# Altium PCB HackatonCircuit.PcbDoc
Units mm, origin at the board's own origin, x right, y up, seen from the top; angles counter-clockwise.
Board outline 94.67 x 39.78 mm, 2 copper layers (Top Layer, Bottom Layer); 39 components, 27 nets, 167 pads, 19 vias.
Unrouted connection lines stored in the file: 1.
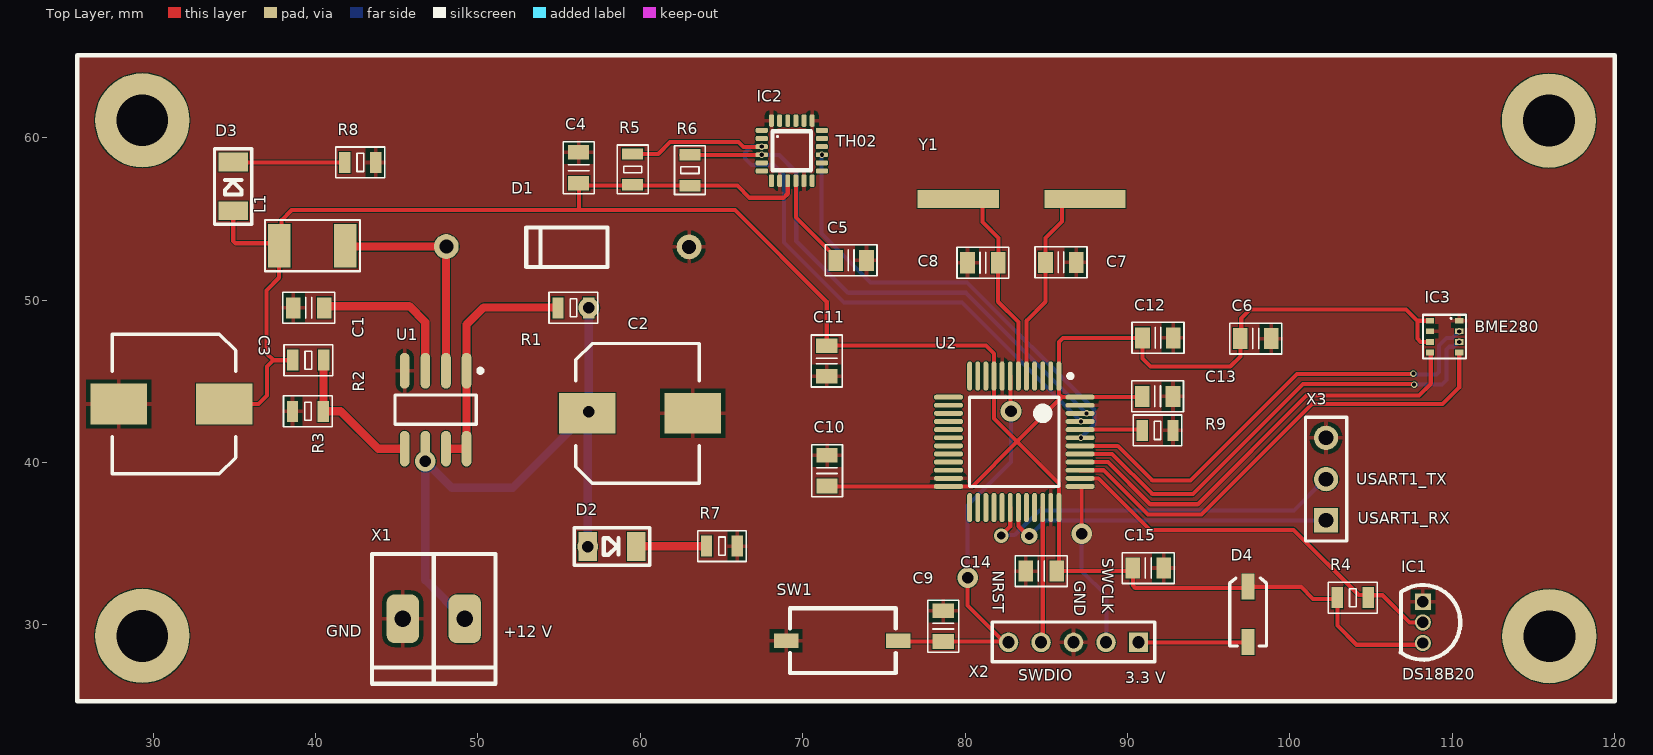
[diagram p0: Top Layer view]
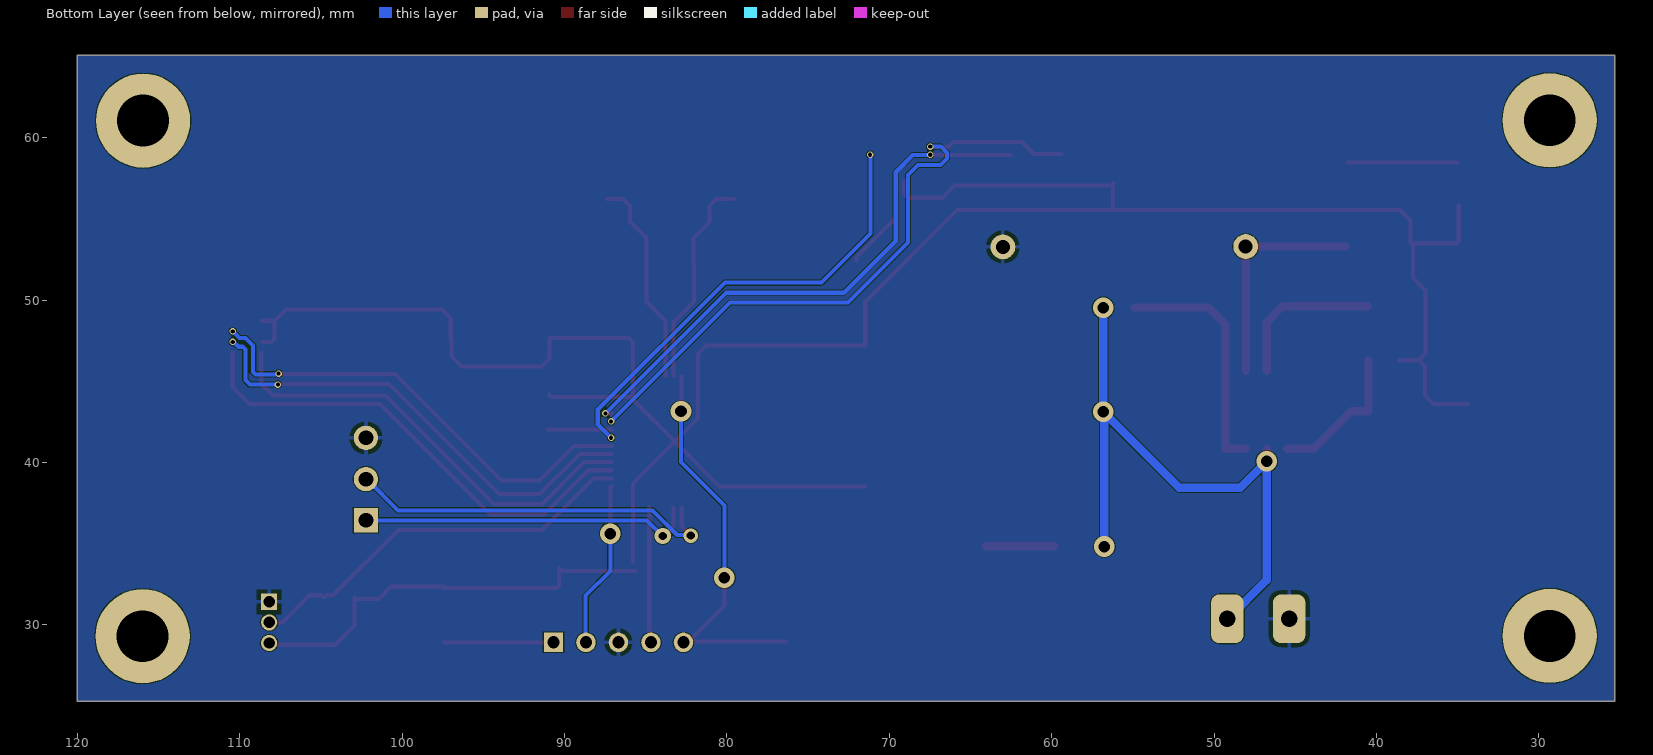
[diagram p1: Bottom Layer view, seen from below]

## Layer stack, top to bottom
Top Solder: solder mask 0.0102, Solder Resist, Dk 3.5
Top Layer: signal copper 0.0356
Dielectric 1: dielectric 0.32, FR-4, Dk 4.8
Bottom Layer: signal copper 0.0356
Bottom Solder: solder mask 0.0102, Solder Resist, Dk 3.5

## Board outline
25.325,25.3 25.325,65.075 120,65.075 120,25.3

## Design rules (kind name [scope] priority, off if disabled: settings)
Clearance [All] p1: gap=0.05 ignorepadtopadclearanceinfootprint=TRUE except(0: Arc-Hole Track-Hole SMDPad-Hole THPad-Hole Via-Hole Fill-Hole Poly-Hole Region-Hole Text-Hole)
PasteMaskExpansion [All] p1 off: expansion=0
PolygonConnect [All] p1: connectstyle=Relief reliefconductorwidth=0.254 reliefentries=4 polygonreliefangle="90 Angle" airgapwidth=0.254
RoutingVias [All] p1: holewidth=0.254 width=0.4 viastyle="Through Hole" minholewidth=0.254 minwidth=0.4 maxholewidth=0.711 maxwidth=1.27
SolderMaskExpansion [All] p1 off: expansion=0.102 istentingtop=FALSE
Width [All] p1: maxlimit=0.6 minlimit=0.254 preferedwidth=0.254 minimp=50.000000 maximp=50.000000 favimp=50.000000
29 further rules are at their usual default settings.

## Classes and differential pairs
component class Designator: C7 C8 C9 C10 C11 C12 C13 C14 C15 D4 R9 SW1 U2 X2 X3 Y1

## Components (designator, comment, footprint, x,y, rotation, side; value= is the part's Value field where it differs from the comment)
C1 "300 pF" C_0805 39.575,49.525 r0 top
C2 "47 uF" "Cap 0810 F" 56.725,43.025 r0 top
C3 "100 uF" "Cap 0810 F" 34.375,43.6 r180 top
C4 "0.1 uF" C_0805 56.2,58.15 r270 top
C5 "4.7 uF" C_0805 72.975,52.45 r180 top
C6 "0.1 uF" C_0805 97.896,47.631 r0 top
C7 "10 pF" C_0805 85.9,52.325 r180 top
C8 "10 pF" C_0805 81.096,52.302 r0 top
C9 "0.1 uF" C_0805 78.65,29.925 r270 top
C10 "4.7 uF" C_0805 71.5,39.5 r270 top
C11 "0.1 uF" C_0805 71.475,46.25 r90 top
C12 "0.1 uF" C_0805 91.875,47.675 r180 top
C13 "0.1 uF" C_0805 91.85,44.075 r180 top
C14 "0.1 uF" C_0805 84.688,33.312 r0 top
C15 "0.1 uF" C_0805 91.275,33.5 r180 top
D1 "1N5819" DO-41 63,53.275 r90 top
D2 "RED" LED_1206 58.25,34.825 r0 top
D3 "GREEN" LED_1206 34.925,57 r90 top
D4 "MBR0520L" SOD-123 97.425,30.65 r90 top
IC1 "DS18B20" DS18B20 108.189,28.882 r0 top
IC2 "TH-02" TH-02 67.475,60.45 r0 top
IC3 "BME280" BME280 110.425,48.725 r0 top
L1 "68 uH" L_1210 39.8,53.35 r180 top
R1 "0.43 Ohm" R_0805 55.875,49.525 r180 top
R2 "15 kOhm" R_0805 39.55,46.3 r0 top
R3 "9.1 kOhm" R_0805 39.525,43.15 r0 top
R4 "4.7 kOhm" R_0805 103.871,31.676 r0 top
R5 "10 kOhm" R_0805 59.525,58.05 r270 top
R6 "10 kOhm" R_0805 63.05,58 r270 top
R7 "600 Ohm" R_0805 65.025,34.85 r0 top
R8 "180 Ohm" R_0805 42.75,58.475 r180 top
R9 "10 kOhm" R_0805 91.85,41.975 r180 top
SW1 "KLS7-TS3611" KLS7-TS3611 72.475,29.025 r180 top
U1 "MC34063" SO-8 47.39,43.25 r270 top
U2 "STM32F103C8T6" LQFP48_N 83.025,41.275 r270 top
X1 "DG340R-3.81-02P" 340-021-12 47.275,30.375 r0 top
X2 "PLS2-5" PLS-5-2 90.675,28.925 r90 top
X3 "PLS-3" PLS-3-3D 102.225,36.435 r90 top
Y1 "HC-49SM" HC-49SM 79.575,56.225 r0 top

## Footprints (in the part's own frame and the unit in brackets; to place one, negate y for a bottom-side part, rotate by r counter-clockwise, add the part's x,y. Pads: shape width x height; smd on the part's side, far side on the other; paste and mask are expansions set on the pad)
340-021-12 [mm]
  rrect50% 2x3 hole 1: 1(1.905,0) 2(-1.905,0)
  silkscreen extent -3.81,-4 3.81,4, body extent -4,-3.75 3.81,3.75, height 8.5
BME280 [mm]
  rect 0.5x0.35 smd: 1(0,0) 2(0,-0.65) 3(0,-1.3) 4(0,-1.95) 5(-1.8,-1.95) 6(-1.8,-1.3) 7(-1.8,-0.65) 8(-1.8,0)
  silkscreen extent -2.22,-2.32 0.43,0.38, body extent -2.15,-2.22 0.35,0.28, height 1.02
C_0805 [mm] "Capacitor Pattern"
  rect 0.9x1.3 smd: 1(-0.95,0) 2(0.95,0)
  silkscreen extent -1.6,-0.95 1.6,0.95, body extent -1,-0.63 1,0.62, height 0.6
"Cap 0810 F" [mm] "Aluminum SMT 8.6x8.6x10mm cap"
  rect 3.5x2.5 smd: 1(6.5,0) 2(0,0)
  silkscreen extent -0.7,-4.3 6.9,4.3, body extent -1.65,-4.25 8.05,4.25, height 10.3
DO-41 [mil]
  round 60 hole 34.02: 1(0,0) 2(0.98,588.58)
  silkscreen extent -48,198 47,395, body extent -49,-17 49,605, height 99
DS18B20 [mm]
  rect 1x1 hole 0.7: 1(0,2.54)
  round 1 hole 0.7: 2(0,1.27) 3(0,0)
  silkscreen extent -1.38,-1.03 2.3,3.57, body extent -1.19,-1.02 2.37,3.56, height 6.18
HC-49SM [mm]
  rect 5x1.1 smd: 1(0,0) 2(7.8,0)
  body extent -2.03,-2.37 9.58,2.33, height 4.2
KLS7-TS3611 [mm]
  rect 1.5x0.9 smd mask+0: 1(-3.4,0) 2(3.5,0)
  silkscreen extent -3.25,-2 3.25,2, body extent -3.49,-1.8 3.49,1.7, height 5.24
L_1210 [mil] "Chip Inductor, 2-Leads, Body 3,1x2,5mm, IPC Medium Density"
  rect 55x105 smd: 1(-80,0) 2(80,0)
  silkscreen extent -115,-62 115,62, body extent -63,-50 63,48, height 99
LED_1206 [mm]
  rect 1.15x1.8 smd: 1(-1.5,0) 2(1.5,0)
  silkscreen extent -2.32,-1.15 2.33,1.15, body extent -1.6,-0.8 1.6,0.8, height 1.1
LQFP48_N [mm] "Thin QFP, 48-Leads, Body 7x7mm, Pitch 0.5mm, IPC Medium Density"
  oval 1.8x0.3 smd: 1(-4.05,2.75) 2(-4.05,2.25) 3(-4.05,1.75) 4(-4.05,1.25) 5(-4.05,0.75) 6(-4.05,0.25) 7(-4.05,-0.25) 8(-4.05,-0.75) 9(-4.05,-1.25) 10(-4.05,-1.75) 11(-4.05,-2.25) 12(-4.05,-2.75) 25(4.05,-2.75) 26(4.05,-2.25) 27(4.05,-1.75) 28(4.05,-1.25) 29(4.05,-0.75) 30(4.05,-0.25) 31(4.05,0.25) 32(4.05,0.75) 33(4.05,1.25) 34(4.05,1.75) 35(4.05,2.25) 36(4.05,2.75)
  oval 0.3x1.8 smd: 13(-2.75,-4.05) 14(-2.25,-4.05) 15(-1.75,-4.05) 16(-1.25,-4.05) 17(-0.75,-4.05) 18(-0.25,-4.05) 19(0.25,-4.05) 20(0.75,-4.05) 21(1.25,-4.05) 22(1.75,-4.05) 23(2.25,-4.05) 24(2.75,-4.05) 37(2.75,4.05) 38(2.25,4.05) 39(1.75,4.05) 40(1.25,4.05) 41(0.75,4.05) 42(0.25,4.05) 43(-0.25,4.05) 44(-0.75,4.05) 45(-1.25,4.05) 46(-1.75,4.05) 47(-2.25,4.05) 48(-2.75,4.05)
  silkscreen extent -4.17,-2.75 2.75,3.58, body extent -4.5,-4.5 4.5,4.5, height 1.5
PLS-3-3D [mm] "Connector; Header; 3 Position"
  rect 1.5x1.5 hole 0.9: 1(0,0)
  round 1.5 hole 0.9: 2(2.54,0) 3(5.08,0)
  silkscreen extent -1.27,-1.27 6.35,1.27, body extent -1.27,-1.27 6.35,1.27, height 8.44
PLS-5-2 [mm] "Connector; Header; 1x5 Position"
  rect 1.2x1.2 hole 0.75: 1(0,0)
  round 1.2 hole 0.75: 2(0,2) 3(0,4) 4(0,6) 5(0,8)
  silkscreen extent -1.2,-1 1.25,9, body extent -1.2,-1 1.2,9, height 5.5
R_0805 [mm] "Resistor Pattern"
  rect 0.7x1.3 smd: 1(-0.95,0) 2(0.95,0)
  silkscreen extent -1.5,-0.95 1.5,0.95, body extent -1,-0.6 1,0.6, height 0.5
SO-8 [mm] "SOIC, 8-Leads, Body 4.9x3.9mm, Pitch 1.27mm, IPC Medium Density"
  oval 2.2x0.6 smd: 1(-2.4,1.905) 2(-2.4,0.635) 3(-2.4,-0.635) 4(-2.4,-1.905) 5(2.4,-1.905) 6(2.4,-0.635) 7(2.4,0.635) 8(2.4,1.905)
  silkscreen extent -2.52,-2.5 0.9,2.88, body extent -3.17,-2.51 3.17,2.49, height 1.88
SOD-123 [mm] "SOD-123; 2 Leads; Body 2.7 x 1.6 mm, (LxW)"
  rect 1.6x0.8 smd: 1(-1.7,0) 2(1.7,0)
  silkscreen extent -1.95,-1.12 2.24,1.12, body extent -1.87,-0.86 1.98,0.84, height 1.43
TH-02 [mm]
  rrect50% 0.75x0.3 smd: 1(0,0) 2(0,-0.5) 3(0,-1) 4(0,-1.5) 5(0,-2) 6(0,-2.5) 13(3.7,-2.5) 14(3.7,-2) 15(3.7,-1.5) 16(3.7,-1) 17(3.7,-0.5) 18(3.7,0)
  rrect50% 0.3x0.75 smd: 7(0.6,-3.1) 8(1.1,-3.1) 9(1.6,-3.1) 10(2.1,-3.1) 11(2.6,-3.1) 12(3.1,-3.1) 19(3.1,0.6) 20(2.6,0.6) 21(2.1,0.6) 22(1.6,0.6) 23(1.1,0.6) 24(0.6,0.6)
  silkscreen extent 0.65,-2.45 3.02,-0.05, body extent -0.16,-3.26 3.86,0.76, height 0.9

## Part data
C1 C4 C5 C6 C7 C8 C9 C10 C11 C12 C13 C14 C15: library part C0805, "Capacitor"
C2 C3: library part CAP0810Alu, "Capacitor"
D2 D3: library part LED_SMT_1206, "Typical INFRARED GaAs LED"
D4: library part DZ_SOD123, "Surface Mount Zener Diode", ComponentLink1Description="Manufacturer Link", ComponentLink1URL=http://www.vishay.com/, DatasheetDocument="REV. L-2", LatestRevisionDate=17-Jul-2002, LatestRevisionNote="Re-released for DXP Platform.", PackageReference=SOD-123, Published=8-Jun-2000, Publisher="Altium Limited"
IC1: library part DS18B20+, "Programmable Resolution 1-Wire Digital Thermometer"
IC2: library part TH_02, "Temperature and humidity sensor"
L1: library part L1210, "Inductor", Part Number=NLCV32T-680K-EF
R1 R2 R3 R4 R5 R6 R7 R8 R9: library part R0805, "Resistor"
SW1: library part button
X1: "Connectors", Type=DG340R-3.81-02P
X2: "Header, 5-Pin", LatestRevisionDate=17-Jul-2002, LatestRevisionNote="Re-released for DXP Platform.", Publisher="Altium Limited"
X3: "Header, 3-Pin", LatestRevisionDate=17-Jul-2002, LatestRevisionNote="Re-released for DXP Platform.", Publisher="Altium Limited"
U2: ComponentLink1Description="Manufacturer URL", ComponentLink1URL=http://www.st.com/, ComponentLink2Description="STM32F103 Datasheet", ComponentLink2URL=http://www.st.com/internet/com/TECHNICAL_RESOURCES/TECHNICAL_LITERATURE/DATASHEET/CD00161566.pdf, ComponentLink3Description="STM32 Family Web Page", ComponentLink3URL=www.st.com/stm32, DatasheetVersion="rev13.0, Apr-2011", PackageDescription="48-Pin Low-Profile Quad Flat Pack, 7 x 7 mm Body, 0.5 mm Pitch (LQFP48)", PackageReference=LQFP48, PackageVersion="rev13, Apr-2011"

## Free pads (board coordinates)
  round 5.8 hole 3.2: 2(29.325,29.325) 2(29.325,61.075) 2(115.95,61.05) 2(115.975,29.3)

## Via types
v1: diameter 0.4, hole 0.254, Top Layer to Bottom Layer, 10 vias
v2: diameter 1.27, hole 0.711, Top Layer to Bottom Layer, 7 vias
v3: diameter 1, hole 0.5, Top Layer to Bottom Layer, 1 vias
v4: diameter 0.9, hole 0.508, Top Layer to Bottom Layer, 1 vias

## Nets (pads, with @x,y where several pads share a name; then routed paths per layer and width w, separated by ;. In a path a pad name is that pad's centre, name@x,y a point inside that pad or via, vN(x,y) a via of type N, cw(c..) or ccw(c..) an arc to the next point about the centre after c; other vN are vias at no path point)
"3.3 V": C3.2 C4.2 C6.1 C10.2 C11.2 C12.2 C13.2 C14.2 C15.2 D3.1 D4.2 IC1.3 IC2.9 IC3.6 IC3.8 L1.2 R2.1 R4.1 R5.2 R6.2 U2.1 U2.9 U2.24 U2.36 U2.48 | length 181.3
  Top Layer w0.254: C3.2 36.475,43.6 37,44.125 37,45.9 37.4,46.3 ; D3.1@34.925,55.815 D3.1 34.925,53.649 35.074,53.5 37.618,53.5 L1.2 ; 38.507,55.532 37.891,54.916 37.891,53.473 L1.2 ; 38.525,55.55 56.225,55.55 65.825,55.55 71.475,49.9 C11.2 81.275,47.2 81.775,46.7 U2.9 81.775,42.699 83.194,41.279 ; R2.1 37.4,46.3 ; C4.2 56.35,57.05 59.525,57.05 R6.2 65.975,57.05 66.725,56.3 68.825,56.3 69.075,56.55 IC2.9 ; 56.225,55.575 C4.2@56.225,57.05 ; C10.2@71.462,38.525 U2.24 80.44,38.525 83.194,41.279 ; C14.2 90.137,33.312 C15.2 90.325,32.424 90.474,32.275 D4.2@97.425,32.275 ; C14.2@85.775,33.9 U2.36 85.775,38.699 83.194,41.279 ; C13.2@90.95,44.175 90.8,44.025 U2.48 87.066,44.034 85.949,44.034 ; D4.2 100.675,32.35 101.425,31.6 102.845,31.6 R4.1 102.921,29.954 104.1,28.775 108.082,28.775 IC1.3 ; IC3.6 108.05,47.425 107.85,47.625 107.85,48.725 ; IC3.8 107.85,48.725 ; 37.4,46.3 36.975,46.725 36.975,50.6 37.75,51.375 37.75,53.332 L1.2 ; 83.194,41.279 85.949,44.034 ; 85.949,44.034 85.784,44.199 85.784,45.316 U2.1 85.775,47.425 86.025,47.675 C12.2 90.925,46.4 91.425,45.9 96.325,45.9 96.946,46.521 C6.1 97,47.685 97,48.875 97.55,49.425 107.15,49.425 107.85,48.725
GND: C1.1 C2.1 C3.1 C4.1 C5.1 C6.2 C7.1 C8.1 C9.1 C10.1 C11.1 C12.1 C13.1 C14.1 C15.1 D1.1 IC1.1 IC2.8 IC2.11 IC2.19 IC2.24 IC3.1 IC3.7 R3.1 R7.2 R8.1 R9.1 SW1.2 U1.4 U2.8 U2.23 U2.35 U2.47 X1.2 X2.3 X3.3
NetC1_2: C1.2 U1.3 | length 9.6
  Top Layer w0.254: U1.3@46.75,45.655 U1.3
  Top Layer w0.512: C1.2@40.525,49.625 45.775,49.625 46.75,48.65 U1.3@46.75,45.655
NetC2_2: C2.2 D2.1 R1.1 U1.6 X1.1 | length 38.8
  Top Layer w0.254: C2.2 v2(56.825,43.125)
  Top Layer w0.512: v2(46.755,40.074) U1.6
  Bottom Layer w0.512: X1.1@49.185,30.325 46.755,32.755 v2(46.755,40.074) 48.379,38.45 52.15,38.45 v2@56.725,43.025 ; v2(56.75,34.825) v2@56.75,43 ; v2(56.825,43.125) v2(56.825,49.525)
NetC5_2: C5.2 IC2.10 | length 5.9
  Top Layer w0.254: IC2.10 69.575,55.1 72.025,52.65 C5.2
NetC7_2: C7.2 U2.5 Y1.2 | length 13
  Top Layer w0.254: U2.5 83.775,48.725 84.95,49.9 C7.2 84.95,53.825 85.975,54.85 85.975,55.802 86.398,56.225 Y1.2
NetC8_2: C8.2 U2.6 Y1.1 | length 13.1
  Top Layer w0.254: Y1.1 80.652,56.225 81.075,55.802 81.075,54.8 82.046,53.829 C8.2 82.025,52.281 82.025,49.9 83.275,48.65 U2.6
NetD1_2: D1.2 L1.1 U1.2 | length 13.9
  Top Layer w0.254: L1.1 L1.1@41.882,53.3
  Top Layer w0.512: L1.1@41.882,53.3 D1.2 ; U1.2 D1.2@48.025,53.275
NetD2_2: D2.2 R7.1 | length 4.3
  Top Layer w0.512: D2.2@59.825,34.85 R7.1
NetD3_2: D3.2 R8.2 | length 6.8
  Top Layer w0.254: D3.2@35,58.475 R8.2@41.775,58.475
NetD4_1: D4.1 X2.1 | length 6.8
  Top Layer w0.254: X2.1 97.4,28.925 D4.1
NetIC1_2: IC1.2 R4.2 U2.38 | length 24.9
  Top Layer w0.254: U2.38 88.2,39.025 91.375,35.85 100.225,35.85 104.239,31.836 104.661,31.836 R4.2 104.97,31.825 105.7,31.825 107.373,30.152 IC1.2
NetIC2_3: IC2.3 R5.1 U2.45 | length 39.9
  Top Layer w0.254: R5.1@59.375,59 61.1,59 61.825,59.725 66.05,59.725 66.35,59.425 66.717,59.425 66.719,59.427 67.452,59.427 v1(67.475,59.45) ; U2.45 v1(87.125,42.525)
  Bottom Layer w0.254: v1(67.475,59.45) 66.825,59.45 66.45,59.075 66.45,58.725 66.85,58.325 68.225,58.325 68.85,57.7 68.85,53.55 72.55,49.85 79.8,49.85 v1(87.125,42.525)
NetIC2_4: IC2.4 R6.1 U2.46 | length 34.5
  Top Layer w0.254: R6.1@62.5,58.925 67.225,58.925 67.25,58.95 v1(67.475,58.95) ; U2.46 v1(87.475,43.025)
  Bottom Layer w0.254: v1(67.475,58.95) 67.5,58.925 68.55,58.925 69.6,57.875 69.6,53.65 72.8,50.45 80.05,50.45 v1(87.475,43.025)
NetIC2_15: IC2.15 U2.43 | length 28.3
  Top Layer w0.254: U2.43 v1(87.125,41.525)
  Bottom Layer w0.254: v1(71.175,58.95) 71.15,58.925 71.15,54.1 74.175,51.075 80.125,51.075 87.95,43.25 87.95,42.35 v1(87.125,41.525)
NetIC3_2: IC3.2 U2.42 | length 29
  Top Layer w0.254: U2.42 89.4,41.025 91.525,38.9 93.875,38.9 100.425,45.45 107.575,45.45 v1(107.6,45.475)
  Bottom Layer w0.254: v1(107.6,45.475) 107.628,45.447 107.731,45.447 107.753,45.425 109.026,45.425 109.175,45.574 109.175,47.2 109.636,47.661 110.011,47.661 v1(110.425,48.075)
NetIC3_3: IC3.3 U2.41 | length 29.4
  Top Layer w0.254: U2.41 89.05,40.525 91.525,38.05 94.025,38.05 100.8,44.825 107.625,44.825 v1(107.65,44.8)
  Bottom Layer w0.254: v1(107.65,44.8) 109.375,44.8 109.65,45.075 109.65,46.95 109.83,47.13 110.09,47.13 110.385,47.425 v1(110.425,47.425)
NetIC3_4: IC3.4 U2.39 | length 29.9
  Top Layer w0.254: U2.39 88.525,39.525 91.25,36.8 94.55,36.8 101.35,43.6 109.4,43.6 110.425,44.625 IC3.4
NetIC3_5: IC3.5 U2.40 | length 27.7
  Top Layer w0.254: U2.40 88.8,40.025 91.4,37.425 94.325,37.425 101.025,44.125 107.95,44.125 108.675,44.85 108.675,46.727 108.627,46.775 IC3.5
NetR1_2: R1.2 U1.1 U1.7 U1.8 | length 15
  Top Layer w0.254: R1.2@54.9,49.55 R1.2
  Top Layer w0.512: U1.7 U1.8 U1.1 49.295,48.495 50.35,49.55 R1.2@54.9,49.55
NetR2_2: R2.2 R3.2 U1.5 | length 8.9
  Top Layer w0.254: R3.2 R3.2@40.487,43.162 ; R2.2@40.487,46.287 R2.2
  Top Layer w0.512: R3.2@40.487,43.162 41.537,43.162 43.85,40.85 U1.5 ; R3.2@40.487,43.366 R2.2@40.487,46.287
NetR9_2: R9.2 U2.44 | length 4
  Top Layer w0.254: U2.44 R9.2@91.047,42.025
NRST: C9.2 SW1.1 U2.7 X2.5 | length 25
  Top Layer w0.254: SW1.1@76.35,28.975 82.27,28.975 82.369,29.074 82.419,29.074 82.27,29.074 80.15,31.194 v2(80.15,32.9) ; X2.5@82.419,28.925 X2.5 X2.5@82.526,29.074 ; U2.7 82.784,45.316 82.784,43.191 v2(82.825,43.15)
  Bottom Layer w0.254: v2(80.15,32.9) 80.15,37.35 82.825,40.025 v2(82.825,43.15)
SWCLK: U2.37 X2.2 | length 10.3
  Top Layer w0.254: U2.37 87.154,38.525 87.175,38.504 v2(87.175,35.623)
  Bottom Layer w0.254: v2(87.175,35.623) 87.175,33.325 88.7,31.8 88.7,28.95 X2.2
SWDIO: U2.34 X2.4 | length 8.3
  Top Layer w0.254: X2.4 84.775,29.025 U2.34
USART1_RX: U2.31 X3.1 | length 20.7
  Top Layer w0.254: U2.31 83.275,36.075 83.875,35.475 v3(83.95,35.475)
  Bottom Layer w0.254: v3(83.95,35.475) 83.974,35.475 84.934,36.435 X3.1
USART1_TX: U2.30 X3.2 | length 23.4
  Top Layer w0.254: v4(82.225,35.5) 82.775,36.05 U2.30
  Bottom Layer w0.254: v4(82.225,35.5) 82.263,35.538 83.056,35.538 84.568,37.05 100.25,37.05 102.175,38.975 X3.2
pads on no net: IC2.1 IC2.2 IC2.5 IC2.6 IC2.7 IC2.12 IC2.13 IC2.14 IC2.16 IC2.17 IC2.18 IC2.20 IC2.21 IC2.22 IC2.23 U2.2 U2.3 U2.4 U2.10 U2.11 U2.12 U2.13 U2.14 U2.15 U2.16 U2.17 U2.18 U2.19 U2.20 U2.21 U2.22 U2.25 U2.26 U2.27 U2.28 U2.29 U2.32 U2.33

## Polygon pours and split planes (outlines as drawn)
GND on Top Layer "GND_L01_P000" (solid, pour order 0): 25.325,25.3 25.325,65.075 120,65.075 120,25.3
GND on Bottom Layer "GND_L02_P001" (solid, pour order 1): 25.325,25.3 25.325,65.075 120,65.075 120,25.3

## Silkscreen, mask and mechanical layers (free items; w line width, h text height)
Top Overlay:
  the board outline again, w0.254
  text "TH02" at 72.02,59.445 h0.7
  text "BME280" at 111.37,48.02 h0.7
  text "USART1_TX" at 104.07,38.637 h0.7
  text "USART1_RX" at 104.17,36.237 h0.7
  text "SWCLK" at 88.445,34.105 h0.7 r270
  text "NRST" at 81.695,33.33 h0.7 r270
  text "GND" at 86.72,32.73 h0.7 r270
  text "GND" at 40.645,29.27 h0.7
  text "+12 V" at 51.595,29.245 h0.7
  text "DS18B20" at 106.92,26.62 h0.7
  text "SWDIO" at 83.27,26.545 h0.7
  text "3.3 V" at 89.845,26.395 h0.7